# EAGLE board board to cad (EAGLE 8.0.0), part 1 of 14
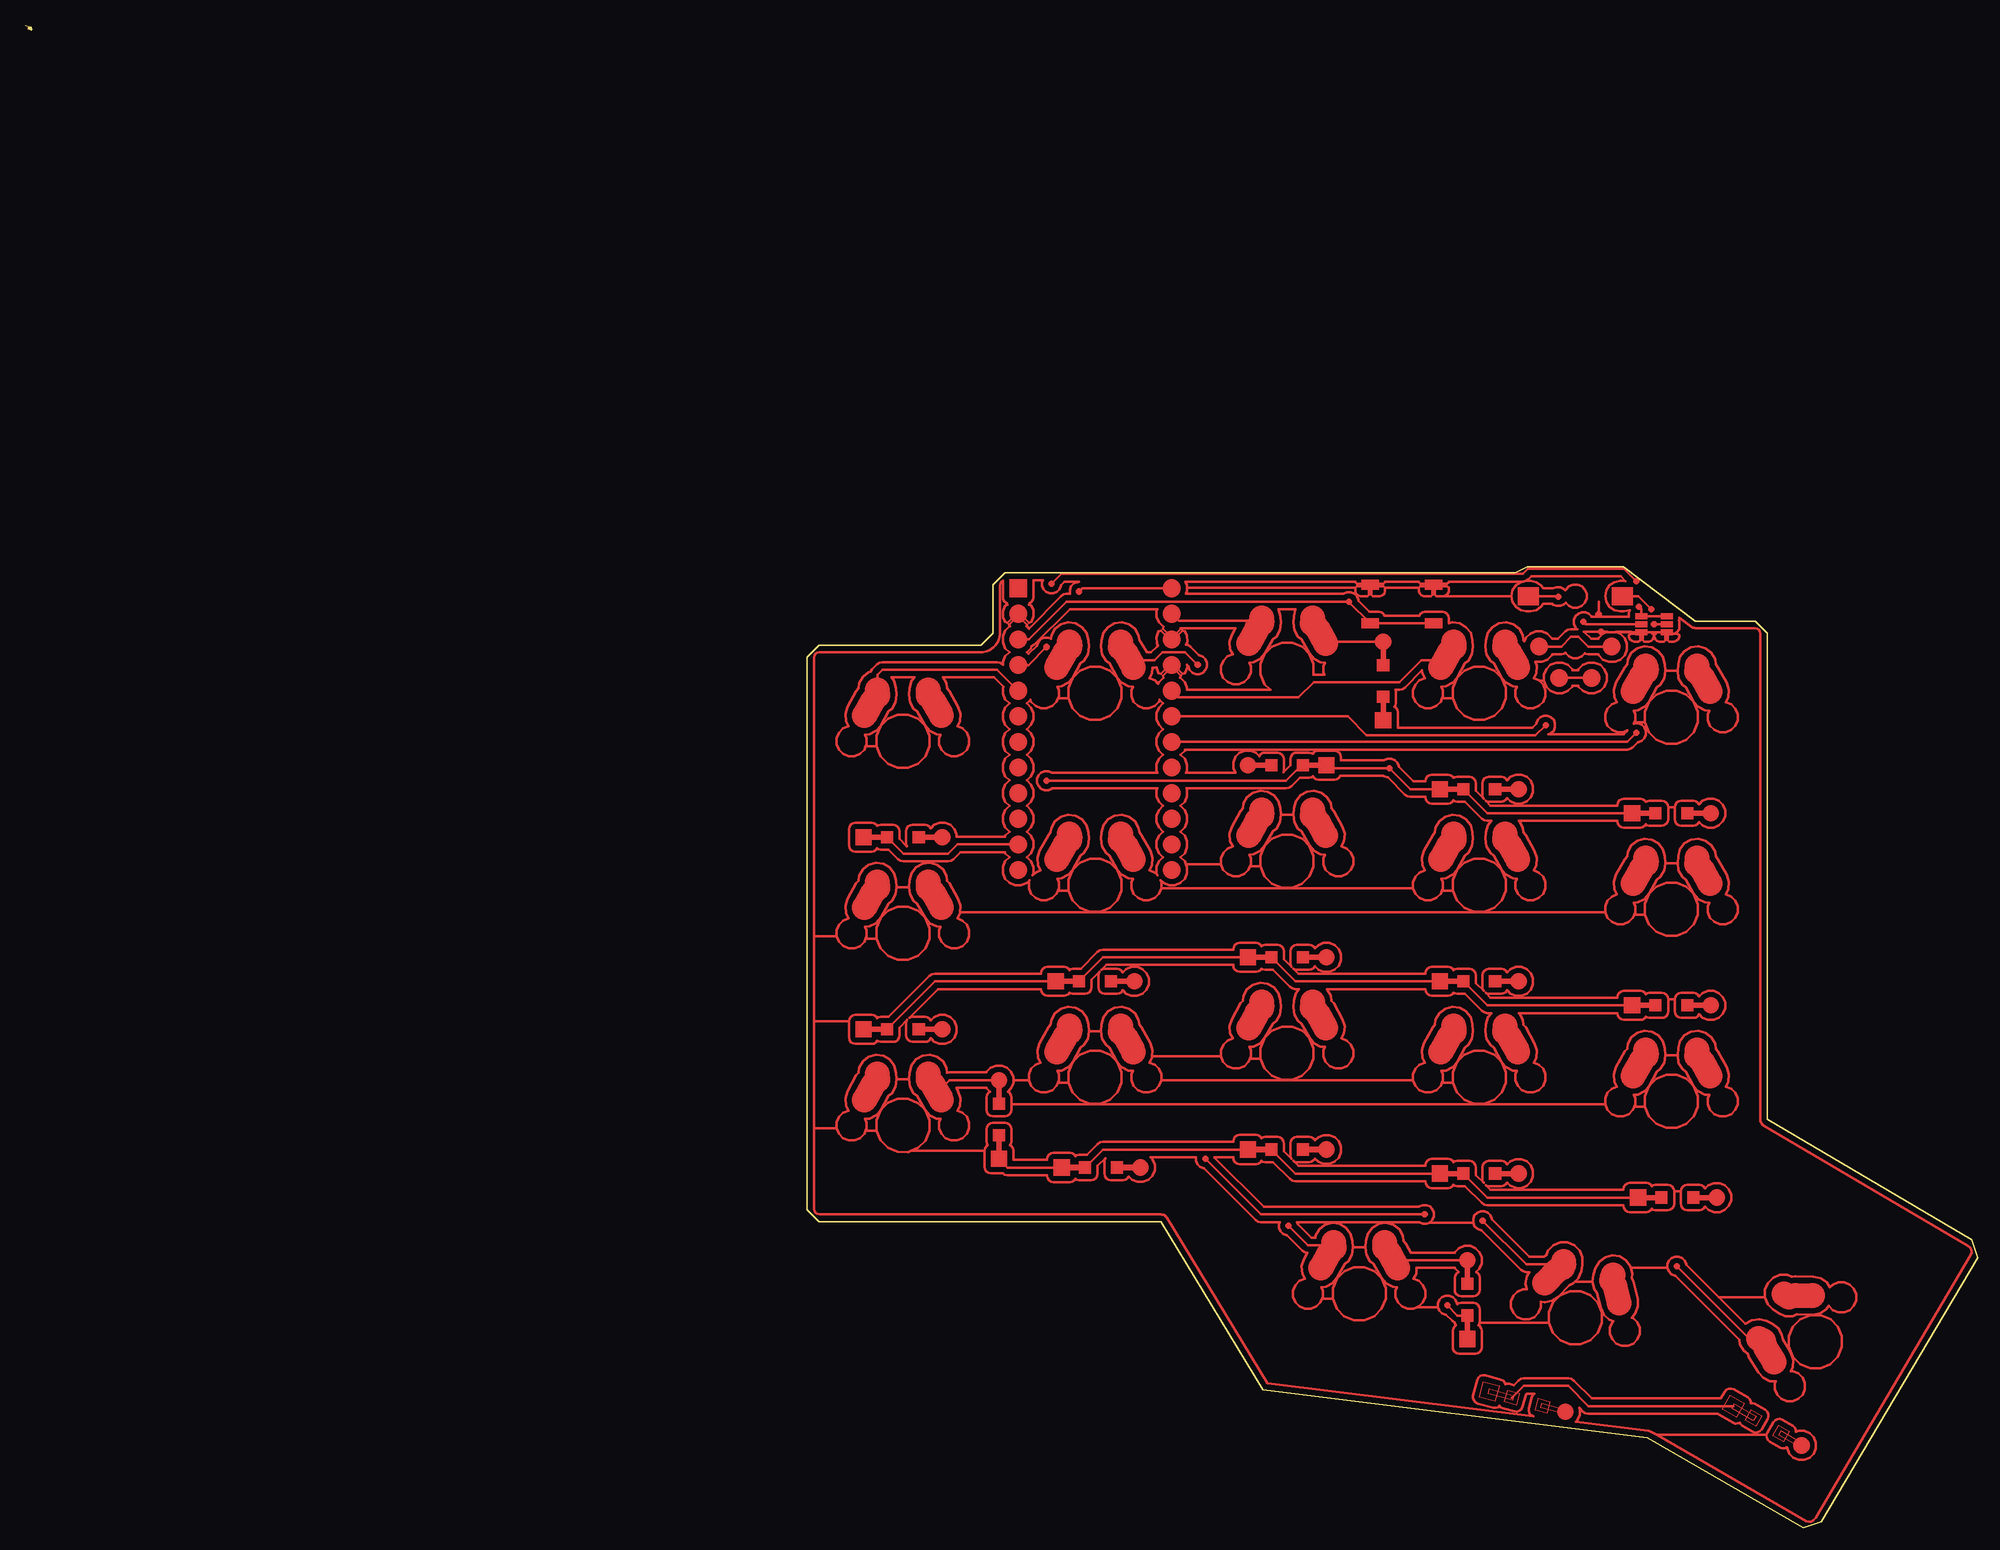
[diagram p0: board, top side]
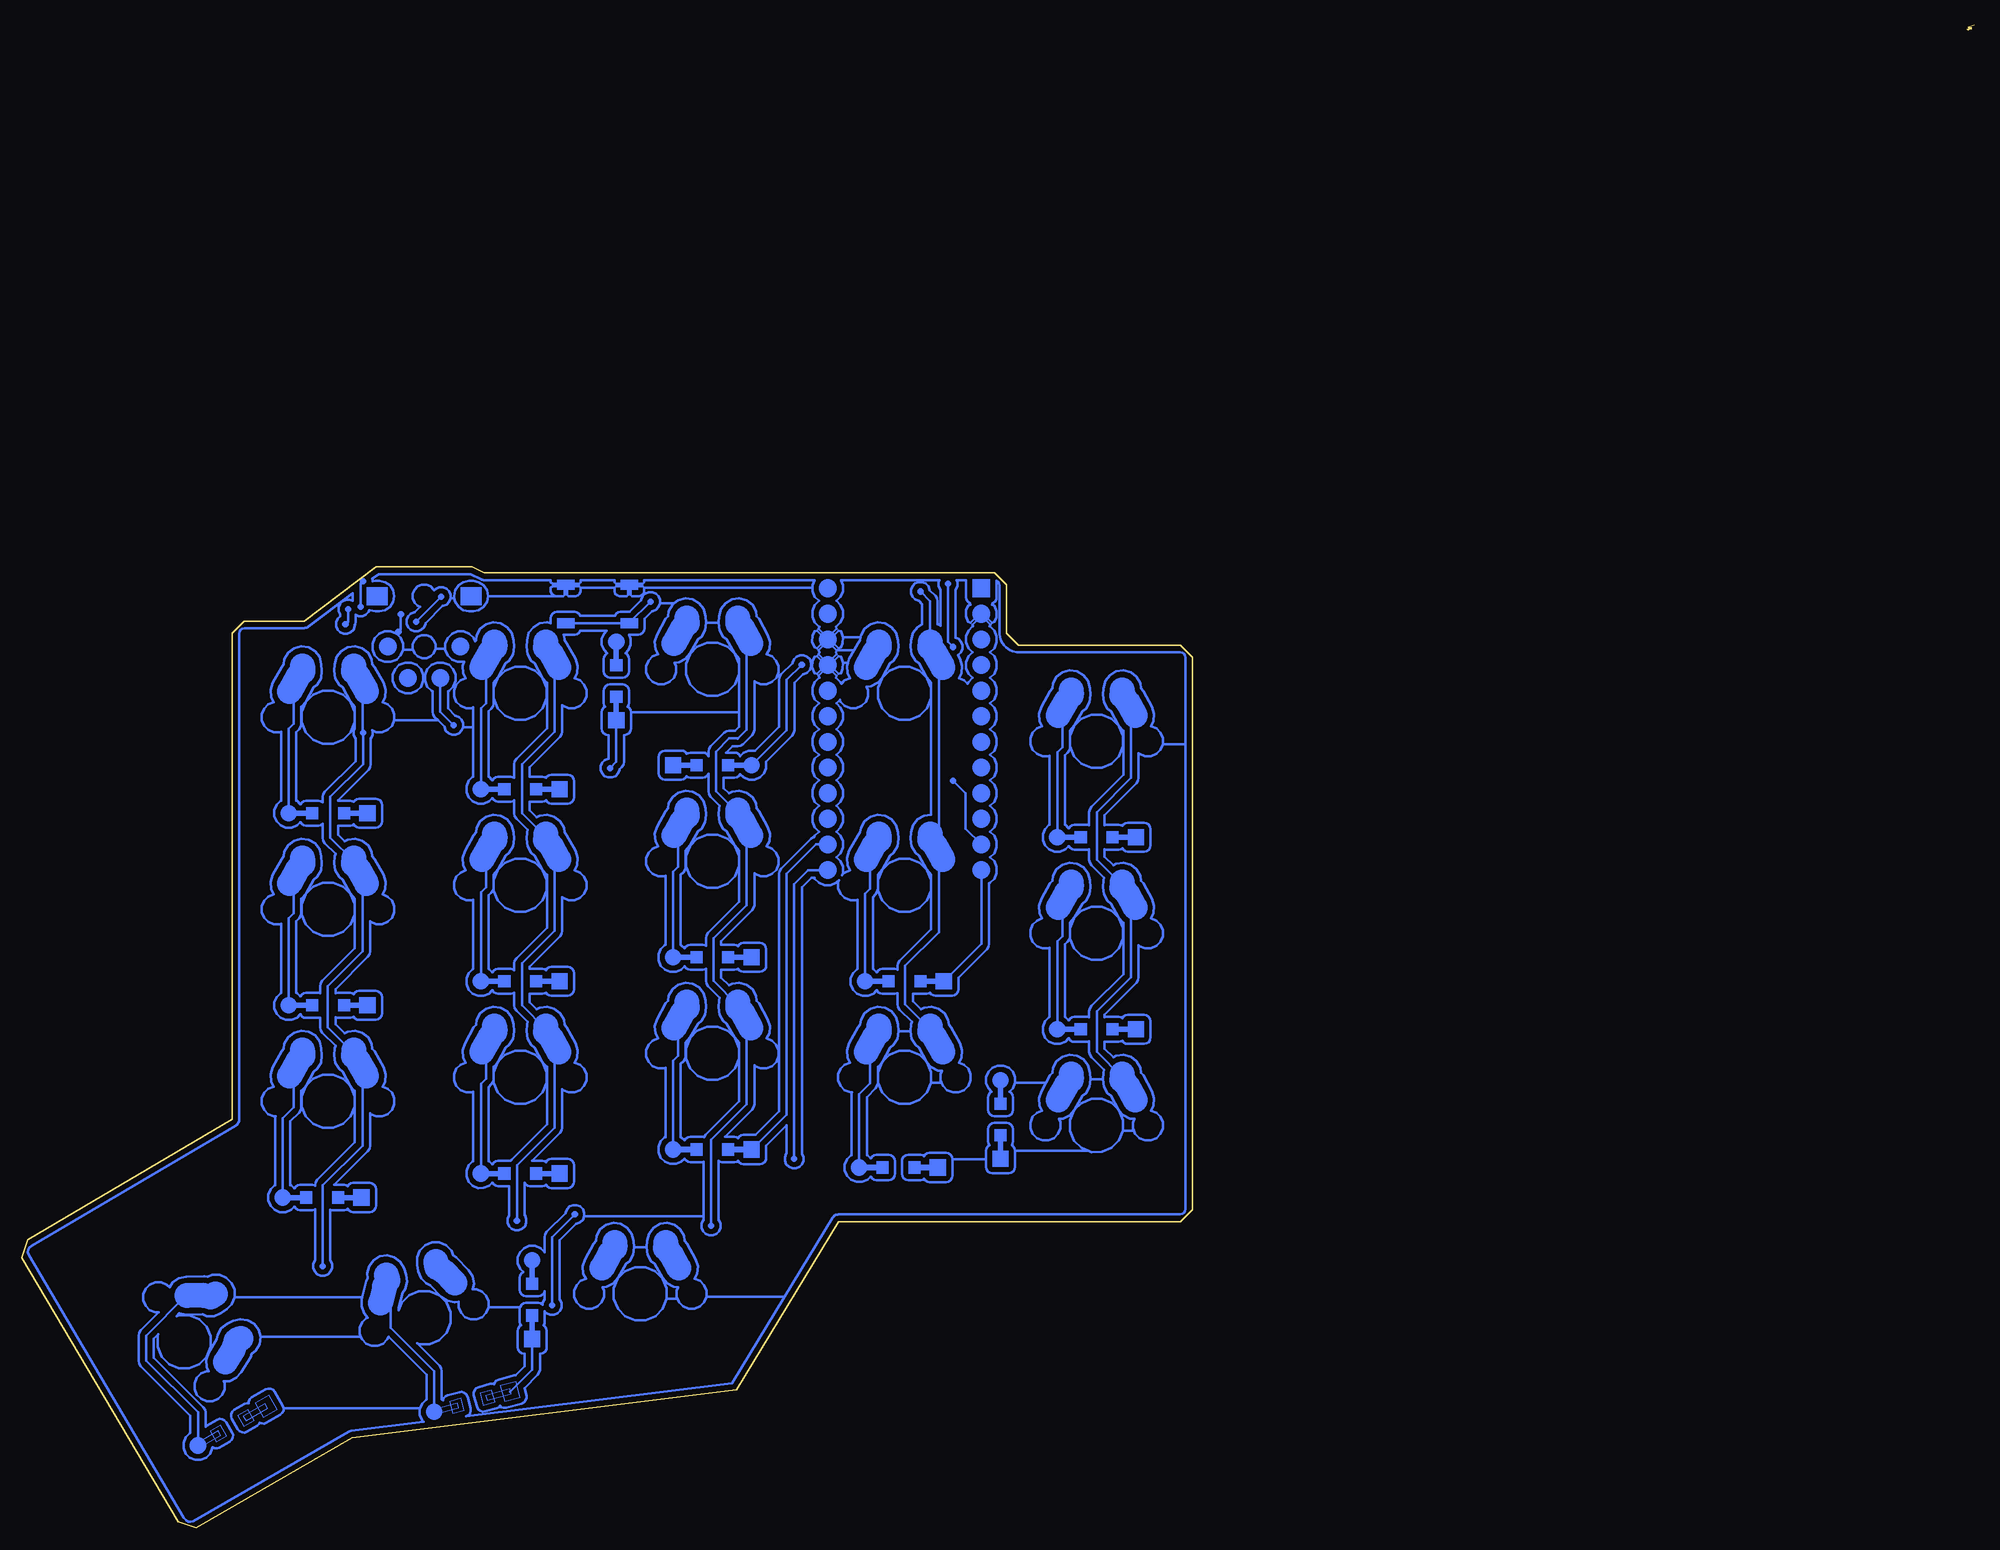
[diagram p1: board, bottom side, seen from below]

No outline drawn. Coordinates in mm, seen from the top.
Copper layers (1*16): Top 0.035mm / dielectric 1.5mm / Bottom 0.035mm
Design rules "default": minimum track width 10mil, minimum drill 24mil, track to track 8mil, track to pad 8mil, pad to pad 8mil, via to via 8mil, smd to smd 8mil, copper to edge 40mil, drill to drill 8mil, minimum pad ring 10mil, minimum via ring 8mil, stop-mask expansion 4mil, vias tented up to drill 0mil, thermal gap 10mil
Milling: 39 lines

## Placement (x,y rotation side)

## Tracks (layer width: path | path; a pad name or v marks a point on that pad's centre or on a via)
S$1
  Top 0: 0,0 0.6,-0.2
  Top 2.5: 171.84,-130.15 172.36,-130.41
  Bottom 2.5: 171.84,-130.15 172.36,-130.41
S$2
  Top 2.5: 175.54,-125.9 177.21,-125.92
  Bottom 2.5: 175.54,-125.9 177.21,-125.92
S$3
  Top 0: 0.6,-0.2 0.3,-0.2
  Top 2.5: 172.54,-131.09 173.4,-132.52
  Bottom 2.5: 172.54,-131.09 173.4,-132.52
S$4
  Top 0: 0.3,-0.2 0.3,-0.3
  Top 2.5: 174.38,-125.75 174.86,-126.08
  Bottom 2.5: 174.38,-125.75 174.86,-126.08
S$5
  Top 0: 0.3,-0.3 0.3,-0.4
  Top 0.1: 149.72,-137.28 150.03,-136.12
  Bottom 0.1: 145.05,-135.67 145.18,-135.18
S$6
  Top 0: 0.3,-0.4 0.3,-0.2
  Top 0.1: 150.03,-136.12 151.19,-136.43
  Bottom 0.1: 145.18,-135.18 147.59,-135.83
S$7
  Top 0: 0.3,-0.2 0.3,-0.3
  Top 0.1: 151.19,-136.43 150.88,-137.59
  Bottom 0.1: 147.59,-135.83 147.47,-136.31
S$8
  Top 0: 0.3,-0.3 0.3,-0.4
  Top 0.1: 150.88,-137.59 149.72,-137.28
  Bottom 0.1: 147.47,-136.31 145.05,-135.67
S$9
  Top 0: 0.3,-0.4 0.3,-0.2
S$10
  Top 0: 0.3,-0.2 0.3,-0.3
  Top 0.1: 146.68,-136.46 146.99,-135.3
  Bottom 0.1: 146.68,-136.46 146.99,-135.3
S$11
  Top 0: 0.3,-0.3 0.3,-0.4
  Top 0.1: 146.99,-135.3 148.15,-135.62
  Bottom 0.1: 146.99,-135.3 148.15,-135.62
S$12
  Top 0: 0.3,-0.4 0.4,-0.2
  Top 0.1: 148.15,-135.62 147.83,-136.77
  Bottom 0.1: 148.15,-135.62 147.83,-136.77
S$13
  Top 0: 0.4,-0.2 0.4,-0.3
  Top 0.1: 147.83,-136.77 146.68,-136.46
  Bottom 0.1: 147.83,-136.77 146.68,-136.46
S$14
  Top 0: 0.4,-0.3 0.4,-0.4
S$15
  Top 0: 0.4,-0.4 0.4,-0.2
  Top 0.1: 144.18,-136 144.6,-134.46
  Bottom 0.1: 149.72,-137.28 150.03,-136.12
S$16
  Top 0: 0.4,-0.2 0.4,-0.3
  Top 0.1: 144.6,-134.46 146.14,-134.87
  Bottom 0.1: 150.03,-136.12 151.19,-136.43
S$17
  Top 0: 0.4,-0.3 0.4,-0.4
  Top 0.1: 146.14,-134.87 145.73,-136.42
  Bottom 0.1: 151.19,-136.43 150.88,-137.59
S$18
  Top 0: 0.4,-0.4 0.5,-0.4
  Top 0.1: 145.73,-136.42 144.18,-136
  Bottom 0.1: 150.88,-137.59 149.72,-137.28
S$19
  Top 0: 0.5,-0.4 0.5,-0.2
S$20
  Top 0: 0.5,-0.2 0.5,-0.3
  Top 0.1: 145.05,-135.67 145.18,-135.18
  Bottom 0.1: 150.27,-137.06 150.4,-136.58
S$21
  Top 0: 0.5,-0.3 0.5,-0.4
  Top 0.1: 145.18,-135.18 147.59,-135.83
  Bottom 0.1: 150.4,-136.58 152.81,-137.23
S$22
  Top 0.1: 147.59,-135.83 147.47,-136.31
  Bottom 0.1: 152.81,-137.23 152.68,-137.71
S$23
  Top 0: 0.5,-0.4 0.5,-0.2
  Top 0.1: 147.47,-136.31 145.05,-135.67
  Bottom 0.1: 152.68,-137.71 150.27,-137.06
S$24
  Top 0: 0.5,-0.2 0.5,-0.3
S$25
  Top 0: 0.5,-0.3 0.5,-0.4
  Top 0.1: 150.27,-137.06 150.4,-136.58
  Bottom 0.1: 144.18,-136 144.6,-134.46
S$26
  Top 0.1: 150.4,-136.58 152.81,-137.23
  Bottom 0.1: 144.6,-134.46 146.14,-134.87
S$27
  Top 0: 0.5,-0.4 0.5,-0.2
  Top 0.1: 152.81,-137.23 152.68,-137.71
  Bottom 0.1: 146.14,-134.87 145.73,-136.42
S$28
  Top 0: 0.5,-0.2 0.5,-0.3
  Top 0.1: 152.68,-137.71 150.27,-137.06
  Bottom 0.1: 145.73,-136.42 144.18,-136
S$29
  Top 0: 0.5,-0.3 0.5,-0.4
S$30
  Top 0: 0.5,-0.4 0.6,-0.2
  Top 0.1: 173.29,-139.84 173.89,-138.8
  Bottom 0.1: 169.2,-137.07 169.45,-136.64
S$31
  Top 0: 0.6,-0.2 0.6,-0.3
  Top 0.1: 173.89,-138.8 174.93,-139.4
  Bottom 0.1: 169.45,-136.64 171.61,-137.89
S$32
  Top 0: 0.6,-0.3 0.6,-0.4
  Top 0.1: 174.93,-139.4 174.33,-140.44
  Bottom 0.1: 171.61,-137.89 171.36,-138.32
S$33
  Top 0: 0.6,-0.4 0.6,-0.5
  Top 0.1: 174.33,-140.44 173.29,-139.84
  Bottom 0.1: 171.36,-138.32 169.2,-137.07
S$34
  Top 0: 0.6,-0.5 0.6,-0.2
S$35
  Top 0: 0.6,-0.2 0.6,-0.3
  Top 0.1: 170.56,-138.26 171.16,-137.22
  Bottom 0.1: 170.56,-138.26 171.16,-137.22
S$36
  Top 0: 0.6,-0.3 0.6,-0.4
  Top 0.1: 171.16,-137.22 172.2,-137.82
  Bottom 0.1: 171.16,-137.22 172.2,-137.82
S$37
  Top 0: 0.6,-0.4 0.6,-0.5
  Top 0.1: 172.2,-137.82 171.6,-138.86
  Bottom 0.1: 172.2,-137.82 171.6,-138.86
S$38
  Top 0: 0.6,-0.5 0.7,-0.4
  Top 0.1: 171.6,-138.86 170.56,-138.26
  Bottom 0.1: 171.6,-138.86 170.56,-138.26
S$39
  Top 0: 0.7,-0.4 0.3,-0.2
S$40
  Top 0: 0.3,-0.2 0.3,-0.3
  Top 0.1: 168.27,-137.17 169.07,-135.78
  Bottom 0.1: 173.29,-139.84 173.89,-138.8
S$41
  Top 0: 0.3,-0.3 0.3,-0.4
  Top 0.1: 169.07,-135.78 170.46,-136.59
  Bottom 0.1: 173.89,-138.8 174.93,-139.4
S$42
  Top 0: 0.3,-0.4 0.4,-0.2
  Top 0.1: 170.46,-136.59 169.66,-137.97
  Bottom 0.1: 174.93,-139.4 174.33,-140.44
S$43
  Top 0: 0.4,-0.2 0.4,-0.3
  Top 0.1: 169.66,-137.97 168.27,-137.17
  Bottom 0.1: 174.33,-140.44 173.29,-139.84
S$44
  Top 0: 0.4,-0.3 0.4,-0.4
S$45
  Top 0: 0.4,-0.4 0.4,-0.2
  Top 0.1: 169.2,-137.07 169.45,-136.64
  Bottom 0.1: 173.87,-139.77 174.12,-139.34
S$46
  Top 0: 0.4,-0.2 0.4,-0.3
  Top 0.1: 169.45,-136.64 171.61,-137.89
  Bottom 0.1: 174.12,-139.34 176.29,-140.59
S$47
  Top 0: 0.4,-0.3 0.4,-0.4
  Top 0.1: 171.61,-137.89 171.36,-138.32
  Bottom 0.1: 176.29,-140.59 176.04,-141.02
S$48
  Top 0: 0.4,-0.4 0.5,-0.4
  Top 0.1: 171.36,-138.32 169.2,-137.07
  Bottom 0.1: 176.04,-141.02 173.87,-139.77
S$49
  Top 0: 0.5,-0.4 0.5,-0.2
S$50
  Top 0: 0.5,-0.2 0.5,-0.3
  Top 0.1: 173.87,-139.77 174.12,-139.34
  Bottom 0.1: 168.27,-137.17 169.07,-135.78
S$51
  Top 0: 0.5,-0.3 0.5,-0.4
  Top 0.1: 174.12,-139.34 176.29,-140.59
  Bottom 0.1: 169.07,-135.78 170.46,-136.59
S$52
  Top 0: 0.5,-0.4 0.6,-0.5
  Top 0.1: 176.29,-140.59 176.04,-141.02
  Bottom 0.1: 170.46,-136.59 169.66,-137.97
S$53
  Top 0: 0.6,-0.5 0.6,-0.2
  Top 0.1: 176.04,-141.02 173.87,-139.77
  Bottom 0.1: 169.66,-137.97 168.27,-137.17
S$54
  Top 0: 0.6,-0.2 0.6,-0.3
S$55
  Top 0: 0.6,-0.3 0.6,-0.4
  Top 2.5: 84.48,-65.88 84.52,-66.46
  Bottom 2.5: 84.48,-65.88 84.52,-66.46
S$56
  Top 0: 0.6,-0.4 0.6,-0.5
  Top 2.5: 90.02,-66.96 90.83,-68.42
  Bottom 2.5: 90.02,-66.96 90.83,-68.42
S$57
  Top 2.5: 84.02,-66.96 83.21,-68.42
  Bottom 2.5: 84.02,-66.96 83.21,-68.42
S$58
  Top 2.5: 89.56,-65.88 89.52,-66.46
  Bottom 2.5: 89.56,-65.88 89.52,-66.46
S$59
  Top 2.5: 103.53,-61.12 103.57,-61.7
  Bottom 2.5: 103.53,-61.12 103.57,-61.7
S$60
  Top 2.5: 109.07,-62.2 109.88,-63.66
  Bottom 2.5: 109.07,-62.2 109.88,-63.66
S$61
  Top 2.5: 103.07,-62.2 102.26,-63.66
  Bottom 2.5: 103.07,-62.2 102.26,-63.66
S$62
  Top 2.5: 108.61,-61.12 108.57,-61.7
  Bottom 2.5: 108.61,-61.12 108.57,-61.7
S$63
  Top 2.5: 122.58,-58.74 122.62,-59.32
  Bottom 2.5: 122.58,-58.74 122.62,-59.32
S$64
  Top 2.5: 128.12,-59.82 128.93,-61.28
  Bottom 2.5: 128.12,-59.82 128.93,-61.28
S$65
  Top 2.5: 122.12,-59.82 121.31,-61.28
  Bottom 2.5: 122.12,-59.82 121.31,-61.28
S$66
  Top 2.5: 127.66,-58.74 127.62,-59.32
  Bottom 2.5: 127.66,-58.74 127.62,-59.32
S$67
  Top 2.5: 141.63,-61.12 141.67,-61.7
  Bottom 2.5: 141.63,-61.12 141.67,-61.7
S$68
  Top 2.5: 147.17,-62.2 147.98,-63.66
  Bottom 2.5: 147.17,-62.2 147.98,-63.66
S$69
  Top 2.5: 141.17,-62.2 140.36,-63.66
  Bottom 2.5: 141.17,-62.2 140.36,-63.66
S$70
  Top 2.5: 146.71,-61.12 146.67,-61.7
  Bottom 2.5: 146.71,-61.12 146.67,-61.7
S$71
  Top 2.5: 160.68,-63.5 160.72,-64.08
  Bottom 2.5: 160.68,-63.5 160.72,-64.08
S$72
  Top 2.5: 166.22,-64.58 167.03,-66.04
  Bottom 2.5: 166.22,-64.58 167.03,-66.04
S$73
  Top 2.5: 160.22,-64.58 159.41,-66.04
  Bottom 2.5: 160.22,-64.58 159.41,-66.04
S$74
  Top 2.5: 165.76,-63.5 165.72,-64.08
  Bottom 2.5: 165.76,-63.5 165.72,-64.08
S$75
  Top 2.5: 84.48,-84.93 84.52,-85.51
  Bottom 2.5: 84.48,-84.93 84.52,-85.51
S$76
  Top 2.5: 90.02,-86.01 90.83,-87.47
  Bottom 2.5: 90.02,-86.01 90.83,-87.47
S$77
  Top 2.5: 84.02,-86.01 83.21,-87.47
  Bottom 2.5: 84.02,-86.01 83.21,-87.47
S$78
  Top 2.5: 89.56,-84.93 89.52,-85.51
  Bottom 2.5: 89.56,-84.93 89.52,-85.51
S$79
  Top 2.5: 103.53,-80.17 103.57,-80.75
  Bottom 2.5: 103.53,-80.17 103.57,-80.75
S$80
  Top 2.5: 109.07,-81.25 109.88,-82.71
  Bottom 2.5: 109.07,-81.25 109.88,-82.71
S$81
  Top 2.5: 103.07,-81.25 102.26,-82.71
  Bottom 2.5: 103.07,-81.25 102.26,-82.71
S$82
  Top 2.5: 108.61,-80.17 108.57,-80.75
  Bottom 2.5: 108.61,-80.17 108.57,-80.75
S$83
  Top 2.5: 122.58,-77.79 122.62,-78.37
  Bottom 2.5: 122.58,-77.79 122.62,-78.37
S$84
  Top 2.5: 128.12,-78.87 128.93,-80.33
  Bottom 2.5: 128.12,-78.87 128.93,-80.33
S$85
  Top 2.5: 122.12,-78.87 121.31,-80.33
  Bottom 2.5: 122.12,-78.87 121.31,-80.33
S$86
  Top 2.5: 127.66,-77.79 127.62,-78.37
  Bottom 2.5: 127.66,-77.79 127.62,-78.37
S$87
  Top 2.5: 141.63,-80.17 141.67,-80.75
  Bottom 2.5: 141.63,-80.17 141.67,-80.75
S$88
  Top 2.5: 147.17,-81.25 147.98,-82.71
  Bottom 2.5: 147.17,-81.25 147.98,-82.71
S$89
  Top 2.5: 141.17,-81.25 140.36,-82.71
  Bottom 2.5: 141.17,-81.25 140.36,-82.71
S$90
  Top 2.5: 146.71,-80.17 146.67,-80.75
  Bottom 2.5: 146.71,-80.17 146.67,-80.75
S$91
  Top 2.5: 160.68,-82.55 160.72,-83.13
  Bottom 2.5: 160.68,-82.55 160.72,-83.13
S$92
  Top 2.5: 166.22,-83.63 167.03,-85.09
  Bottom 2.5: 166.22,-83.63 167.03,-85.09
S$93
  Top 2.5: 160.22,-83.63 159.41,-85.09
  Bottom 2.5: 160.22,-83.63 159.41,-85.09
S$94
  Top 2.5: 165.76,-82.55 165.72,-83.13
  Bottom 2.5: 165.76,-82.55 165.72,-83.13
S$95
  Top 2.5: 84.48,-103.98 84.52,-104.56
  Bottom 2.5: 84.48,-103.98 84.52,-104.56
S$96
  Top 2.5: 90.02,-105.06 90.83,-106.52
  Bottom 2.5: 90.02,-105.06 90.83,-106.52
S$97
  Top 2.5: 84.02,-105.06 83.21,-106.52
  Bottom 2.5: 84.02,-105.06 83.21,-106.52
S$98
  Top 2.5: 89.56,-103.98 89.52,-104.56
  Bottom 2.5: 89.56,-103.98 89.52,-104.56
S$99
  Top 2.5: 103.53,-99.22 103.57,-99.8
  Bottom 2.5: 103.53,-99.22 103.57,-99.8
S$100
  Top 2.5: 109.07,-100.3 109.88,-101.76
  Bottom 2.5: 109.07,-100.3 109.88,-101.76
S$101
  Top 2.5: 103.07,-100.3 102.26,-101.76
  Bottom 2.5: 103.07,-100.3 102.26,-101.76
S$102
  Top 2.5: 108.61,-99.22 108.57,-99.8
  Bottom 2.5: 108.61,-99.22 108.57,-99.8
S$103
  Top 2.5: 122.58,-96.84 122.62,-97.42
  Bottom 2.5: 122.58,-96.84 122.62,-97.42
S$104
  Top 2.5: 128.12,-97.92 128.93,-99.38
  Bottom 2.5: 128.12,-97.92 128.93,-99.38
S$105
  Top 2.5: 122.12,-97.92 121.31,-99.38
  Bottom 2.5: 122.12,-97.92 121.31,-99.38
S$106
  Top 2.5: 127.66,-96.84 127.62,-97.42
  Bottom 2.5: 127.66,-96.84 127.62,-97.42
S$107
  Top 2.5: 141.63,-99.22 141.67,-99.8
  Bottom 2.5: 141.63,-99.22 141.67,-99.8
S$108
  Top 2.5: 147.17,-100.3 147.98,-101.76
  Bottom 2.5: 147.17,-100.3 147.98,-101.76
S$109
  Top 2.5: 141.17,-100.3 140.36,-101.76
  Bottom 2.5: 141.17,-100.3 140.36,-101.76
S$110
  Top 2.5: 146.71,-99.22 146.67,-99.8
  Bottom 2.5: 146.71,-99.22 146.67,-99.8
S$111
  Top 2.5: 160.68,-101.6 160.72,-102.18
  Bottom 2.5: 160.68,-101.6 160.72,-102.18
S$112
  Top 2.5: 166.22,-102.68 167.03,-104.14
  Bottom 2.5: 166.22,-102.68 167.03,-104.14
S$113
  Top 2.5: 160.22,-102.68 159.41,-104.14
  Bottom 2.5: 160.22,-102.68 159.41,-104.14
S$114
  Top 2.5: 165.76,-101.6 165.72,-102.18
  Bottom 2.5: 165.76,-101.6 165.72,-102.18
S$115
  Top 2.5: 129.72,-120.65 129.76,-121.23
  Bottom 2.5: 129.72,-120.65 129.76,-121.23
S$116
  Top 2.5: 135.26,-121.73 136.07,-123.19
  Bottom 2.5: 135.26,-121.73 136.07,-123.19
S$117
  Top 2.5: 129.26,-121.73 128.45,-123.19
  Bottom 2.5: 129.26,-121.73 128.45,-123.19
S$118
  Top 2.5: 134.8,-120.65 134.76,-121.23
  Bottom 2.5: 134.8,-120.65 134.76,-121.23
S$119
  Top 2.5: 152.56,-122.55 152.44,-123.12
  Bottom 2.5: 152.56,-122.55 152.44,-123.12
S$120
  Top 2.5: 157.63,-125.03 158.03,-126.64
  Bottom 2.5: 157.63,-125.03 158.03,-126.64
S$121
  Top 2.5: 151.83,-123.47 150.67,-124.67
  Bottom 2.5: 151.83,-123.47 150.67,-124.67
S$122
  Top 2.5: 157.46,-123.86 157.27,-124.41
  Bottom 2.5: 157.46,-123.86 157.27,-124.41
S$123
  Top 0.25: 126.69,-73.34 126.54,-73.34
  Bottom 0.25: 90.92,-80.49 90.92,-72.05
S$124
  Top 0.25: 126.54,-73.34 125,-74.88
  Bottom 0.25: 90.42,-71.56 90.42,-67.69
S$125
  Top 0.25: 125,-74.88 101.25,-74.88
  Bottom 0.25: 90.92,-72.05 90.42,-71.56
S$126
  Top 0.25: 98.45,-81.2 92.43,-81.2
  Bottom 0.25: 101.25,-74.88 100,-76.13
S$127
  Top 0.25: 87.09,-82.13 85.44,-80.49
  Bottom 0.25: 100,-76.13 100,-79.65
S$128
  Top 0.25: 91.5,-82.13 87.09,-82.13
  Bottom 0.25: 100,-79.65 98.45,-81.2
S$129
  Top 0.25: 92.43,-81.2 91.5,-82.13
  Bottom 0.25: 134.64,-68.91 134.64,-73.03
S$130
  Top 0.25: 135.25,-73.63 129.31,-73.63
  Bottom 0.25: 134.64,-73.03 135.25,-73.63
S$131
  Top 0.25: 129.31,-73.63 129.02,-73.34
  Bottom 0.25: 117.75,-69.88 121.22,-73.34
S$132
  Top 0.25: 137.34,-75.72 140.27,-75.72
  Bottom 0.25: 117.75,-64.88 117.75,-69.88
S$133
  Top 0.25: 135.25,-73.63 137.34,-75.72
  Bottom 0.25: 116.25,-63.38 117.75,-64.88
S$134
  Top 0.25: 159.32,-78.11 144.97,-78.11
  Bottom 0.25: 148.07,-75.72 148.07,-67.7
S$135
  Top 0.25: 144.97,-78.11 142.59,-75.72
  Bottom 0.25: 147.57,-67.2 147.57,-62.93
S$136
  Top 0.25: 109.47,-62.93 111.95,-62.93
  Bottom 0.25: 148.07,-67.7 147.57,-67.2
S$137
  Top 0.25: 115,-62.13 116.25,-63.38
  Bottom 0.25: 167.12,-78.11 167.12,-69.75
S$138
  Top 0.25: 112.75,-62.13 115,-62.13
  Bottom 0.25: 166.62,-69.25 166.62,-65.31
S$139
  Top 0.25: 111.95,-62.93 112.75,-62.13
  Bottom 0.25: 167.12,-69.75 166.62,-69.25
S$140
  Top 0.25: 134.64,-61.11 129.08,-61.11
  Bottom 0.25: 90.92,-99.54 90.92,-90.8
S$141
  Top 0.25: 129.08,-61.11 128.52,-60.55
  Bottom 0.25: 90.42,-90.31 90.42,-86.74
S$142
  Top 0.25: 102.17,-94.78 90.21,-94.78
  Bottom 0.25: 90.92,-90.8 90.42,-90.31
S$143
  Top 0.25: 90.21,-94.78 85.44,-99.54
  Bottom 0.25: 98.45,-83.74 98.45,-91.06
S$144
  Top 0.25: 121.22,-92.39 106.88,-92.39
  Bottom 0.25: 98.45,-91.06 102.17,-94.78
S$145
  Top 0.25: 106.88,-92.39 104.49,-94.78
  Bottom 0.25: 109.97,-94.78 109.97,-86.1
S$146
  Top 0.25: 140.27,-94.78 125.92,-94.78
  Bottom 0.25: 109.47,-85.61 109.47,-81.98
S$147
  Top 0.25: 125.92,-94.78 123.54,-92.39
  Bottom 0.25: 109.97,-86.1 109.47,-85.61
S$148
  Top 0.25: 159.32,-97.16 144.97,-97.16
  Bottom 0.25: 129.02,-92.39 129.02,-83.9
S$149
  Top 0.25: 144.97,-97.16 142.59,-94.78
  Bottom 0.25: 128.52,-83.41 128.52,-79.6
S$150
  Top 0.25: 96.54,-104.57 91.65,-104.57
  Bottom 0.25: 129.02,-83.9 128.52,-83.41
S$151
  Top 0.25: 91.65,-104.57 90.42,-105.79
  Bottom 0.25: 148.07,-94.78 148.07,-85.95
S$152
  Top 0.25: 102.76,-113.23 97.41,-113.23
  Bottom 0.25: 147.57,-85.45 147.57,-81.98
S$153
  Top 0.25: 97.41,-113.23 96.54,-112.37
  Bottom 0.25: 148.07,-85.95 147.57,-85.45
S$154
  Top 0.25: 121.22,-111.44 106.88,-111.44
  Bottom 0.25: 167.12,-97.16 167.12,-88.5
S$155
  Top 0.25: 106.88,-111.44 105.09,-113.23
  Bottom 0.25: 166.62,-88 166.62,-84.36
S$156
  Top 0.25: 140.27,-113.83 125.92,-113.83
  Bottom 0.25: 167.12,-88.5 166.62,-88
S$157
  Top 0.25: 125.92,-113.83 123.54,-111.44
  Bottom 0.25: 113.69,-81.2 114.82,-81.2
S$158
  Top 0.25: 159.91,-116.21 144.97,-116.21
  Bottom 0.25: 117.75,-107.97 121.22,-111.44
S$159
  Top 0.25: 144.97,-116.21 142.59,-113.83
  Bottom 0.25: 117.75,-84.13 117.75,-107.97
S$160
  Top 0.25: 142.98,-122.43 135.7,-122.43
  Bottom 0.25: 114.82,-81.2 117.75,-84.13
S$161
  Top 0.25: 135.7,-122.43 135.67,-122.46
  Bottom 0.25: 110.56,-113.23 110.56,-105.94
S$162
  Top 0.25: 142.02,-127.9 142.98,-127.9
  Bottom 0.25: 109.47,-104.86 109.47,-101.03
S$163
  Top 0.25: 141,-126.88 142.02,-127.9
  Bottom 0.25: 110.56,-105.94 109.47,-104.86
S$164
  Top 0.25: 122.5,-117.88 138.75,-117.88
  Bottom 0.25: 129.02,-111.44 129.02,-102.65
S$165
  Top 0.25: 117,-112.38 122.5,-117.88
  Bottom 0.25: 128.52,-102.16 128.52,-98.65
S$166
  Top 0.25: 169.37,-136.88 155,-136.88
  Bottom 0.25: 129.02,-102.65 128.52,-102.16
S$167
  Top 0.25: 148.57,-134.88 147.41,-136.04
  Bottom 0.25: 148.07,-113.83 148.07,-104.95
S$168
  Top 0.25: 153,-134.88 148.57,-134.88
  Bottom 0.25: 147.57,-104.45 147.57,-101.03
S$169
  Top 0.25: 155,-136.88 153,-134.88
  Bottom 0.25: 148.07,-104.95 147.57,-104.45
S$170
  Top 0.25: 84.5,-66.17 84.5,-64.38
  Bottom 0.25: 167.71,-116.21 167.71,-108.34
S$171
  Top 0.25: 96.37,-63.88 98.45,-65.96
  Bottom 0.25: 166.62,-107.25 166.62,-103.41
S$172
  Top 0.25: 85,-63.88 96.37,-63.88
  Bottom 0.25: 167.71,-108.34 166.62,-107.25
S$173
  Top 0.25: 84.5,-64.38 85,-63.88
  Bottom 0.25: 113.69,-83.74 115.61,-83.74
S$174
  Top 0.25: 113.69,-55.8 104.83,-55.8
  Bottom 0.25: 141,-120.13 141,-126.88
S$175
  Top 0.25: 104.83,-55.8 104.5,-56.13
  Bottom 0.25: 138.75,-117.88 141,-120.13
S$176
  Top 0.25: 127.19,-120.94 129.74,-120.94
  Bottom 0.25: 117,-85.13 117,-112.38
S$177
  Top 0.25: 125.25,-119 127.19,-120.94
  Bottom 0.25: 115.61,-83.74 117,-85.13
S$178
  Top 0.25: 122.6,-59.03 114.38,-59.03
  Bottom 0.25: 142.98,-130.23 142.98,-133.25
S$179
  Top 0.25: 114.38,-59.03 113.69,-58.34
  Bottom 0.25: 142.98,-133.25 145.16,-135.44
S$180
  Top 0.25: 144.5,-118.5 148.83,-122.83
  Bottom 0.25: 152.7,-137.46 152.7,-133.43
S$181
  Top 0.25: 148.83,-122.83 152.5,-122.83
  Bottom 0.25: 157,-129.13 157,-126.66
S$182
  Top 0.25: 140.76,-62.93 138.45,-62.93
  Bottom 0.25: 152.7,-133.43 157,-129.13
S$183
  Top 0.25: 114.36,-66.63 113.69,-65.96
  Bottom 0.25: 157,-126.66 157.83,-125.83
S$184
  Top 0.25: 126.25,-66.63 114.36,-66.63
  Bottom 0.25: 176.12,-140.78 176.12,-137.51
S$185
  Top 0.25: 127.75,-65.13 126.25,-66.63
  Bottom 0.25: 181.25,-129.88 177.28,-125.91
S$186
  Top 0.25: 136.25,-65.13 127.75,-65.13
  Bottom 0.25: 181.25,-132.38 181.25,-129.88
S$187
  Top 0.25: 138.45,-62.93 136.25,-65.13
  Bottom 0.25: 176.12,-137.51 181.25,-132.38
S$188
  Top 0.25: 163.75,-123 171.03,-130.28
  Bottom 0.25: 177.28,-125.91 176.38,-125.91
S$189
  Top 0.25: 171.03,-130.28 172.1,-130.28
  Bottom 0.25: 83.61,-67.69 83.61,-74.61
S$190
  Top 0.25: 113.69,-71.04 158.84,-71.04
  Bottom 0.25: 87,-82.72 84.5,-85.22
S$191
  Top 0.25: 158.84,-71.04 159.75,-70.13
  Bottom 0.25: 87,-78 87,-82.72
S$192
  Top 0.25: 171.15,-130.28 172.1,-130.28
  Bottom 0.25: 83.61,-74.61 87,-78
S$193
  Top 0.25: 113.69,-68.5 131.12,-68.5
  Bottom 0.25: 83.61,-86.74 83.61,-94.36
S$194
  Top 0.25: 149.75,-70.38 150.75,-69.38
  Bottom 0.25: 87,-101.77 84.5,-104.27
S$195
  Top 0.25: 133,-70.38 149.75,-70.38
  Bottom 0.25: 87,-97.75 87,-101.77
S$196
  Top 0.25: 131.12,-68.5 133,-70.38
  Bottom 0.25: 83.61,-94.36 87,-97.75
S$197
  Top 0.25: 152.09,-64.7 155.29,-64.7
  Bottom 0.25: 102.66,-81.98 102.66,-89.91
S$198
  Top 0.25: 150.09,-61.6 152.28,-61.6
  Bottom 0.25: 106,-97.06 103.55,-99.51
S$199
  Top 0.25: 154.97,-61.6 157.3,-61.6
  Bottom 0.25: 106,-93.25 106,-97.06
S$200
  Top 0.25: 154,-60.63 154.97,-61.6
  Bottom 0.25: 102.66,-89.91 106,-93.25
S$201
  Top 0.25: 153.25,-60.63 154,-60.63
  Bottom 0.25: 103.55,-57.08 103.55,-61.41
S$202
  Top 0.25: 152.28,-61.6 153.25,-60.63
  Bottom 0.25: 104.5,-56.13 103.55,-57.08
S$203
  Top 0.25: 162.75,-59.38 161.5,-59.38
  Bottom 0.25: 102.66,-62.93 102.66,-81.98
S$204
  Top 0.25: 159.96,-56.59 158.34,-56.59
  Bottom 0.25: 121.71,-98.65 121.71,-106.96
S$205
  Top 0.25: 161.25,-57.88 159.96,-56.59
  Bottom 0.25: 125.25,-110.5 125.25,-119
S$206
  Top 0.25: 149.05,-56.59 151.96,-56.59
  Bottom 0.25: 121.71,-106.96 125.25,-110.5
S$207
  Top 0.25: 154.75,-59.38 160.25,-59.38
  Bottom 0.25: 121.71,-79.6 121.71,-87.21
S$208
  Top 0.25: 154.5,-59.13 154.75,-59.38
  Bottom 0.25: 125,-94.73 122.6,-97.13
S$209
  Top 0.25: 151.96,-56.59 152,-56.63
  Bottom 0.25: 125,-90.5 125,-94.73
S$210
  Top 0.25: 160.25,-60.18 156.3,-60.18
  Bottom 0.25: 121.71,-87.21 125,-90.5
S$211
  Top 0.25: 156,-58.38 156,-57.13
  Bottom 0.25: 122.56,-70.69 123.44,-70.69
S$212
  Top 0.25: 156.3,-60.18 156.25,-60.13
  Bottom 0.25: 124.75,-75.93 122.6,-78.08
S$213
  Top 0.25: 162.75,-60.18 160.25,-60.18
  Bottom 0.25: 124.75,-72 124.75,-75.93
S$214
  Top 0.25: 148.5,-54.38 133,-54.38
  Bottom 0.25: 123.44,-70.69 124.75,-72
S$215
  Top 0.25: 99.46,-63.42 101.25,-61.63
  Bottom 0.25: 121.71,-60.55 121.71,-69.84
S$216
  Top 0.25: 101.75,-55.38 102.75,-54.38
  Bottom 0.25: 121.71,-69.84 122.56,-70.69
S$217
  Top 0.25: 102.75,-54.38 133,-54.38
  Bottom 0.25: 122.56,-70.69 122.6,-70.73
S$218
  Top 0.25: 99.46,-63.42 98.45,-63.42
  Bottom 0.25: 140.76,-62.93 140.76,-70.01
S$219
  Top 0.25: 160.25,-58.58 160.25,-57.88
  Bottom 0.25: 144,-78.11 141.65,-80.46
S$220
  Top 0.25: 148.5,-54.38 149,-53.88
  Bottom 0.25: 144,-73.25 144,-78.11
S$221
  Top 0.25: 149,-53.88 158.5,-53.88
  Bottom 0.25: 140.76,-70.01 144,-73.25
S$222
  Top 0.25: 158.5,-53.88 159.75,-55.13
  Bottom 0.25: 140.76,-101.03 140.76,-109.26
S$223
  Top 0.25: 160.25,-57.88 160,-57.63
  Bottom 0.25: 144.5,-113 144.5,-118.5
S$224
  Top 0.25: 160.25,-58.58 162.75,-58.58
  Bottom 0.25: 140.76,-109.26 144.5,-113
S$225
  Top 0.25: 131.22,-57.16 131.2,-57.13
  Bottom 0.25: 140.76,-81.98 140.76,-89.76
S$226
  Top 0.25: 131.25,-57.13 131.22,-57.16
  Bottom 0.25: 144,-97.16 141.65,-99.51
S$227
  Top 0.25: 133.35,-59.28 139.65,-59.28
  Bottom 0.25: 144,-93 144,-97.16
S$228
  Top 0.25: 98.45,-60.88 99.5,-60.88
  Bottom 0.25: 140.76,-89.76 144,-93
S$229
  Top 0.25: 131.2,-57.13 133.35,-59.28
  Bottom 0.25: 159.75,-70.13 159.75,-73.25
S$230
  Top 0.25: 103.25,-57.13 131.2,-57.13
  Bottom 0.25: 163,-80.54 160.7,-82.84
S$231
  Top 0.25: 99.5,-60.88 103.25,-57.13
  Bottom 0.25: 163,-76.5 163,-80.54
S$232
  Top 0.254: 158.65,-55.11 158.53,-55.08
  Bottom 0.25: 159.75,-73.25 163,-76.5
S$233
  Top 0.254: 158.53,-55.08 158.16,-55.08
  Bottom 0.25: 159.81,-103.41 159.81,-111.06
S$234
  Top 0.254: 158.16,-55.08 157.58,-55.2
  Bottom 0.25: 163.75,-115 163.75,-123
S$235
  Top 0.254: 157.58,-55.2 157.09,-55.52
  Bottom 0.25: 159.81,-111.06 163.75,-115
S$236
  Top 0.254: 157.09,-55.52 156.76,-56.02
  Bottom 0.25: 159.81,-84.36 159.81,-91.81
S$237
  Top 0.254: 156.76,-56.02 156.65,-56.59
  Bottom 0.25: 163.25,-99.34 160.7,-101.89
S$238
  Top 0.254: 156.65,-56.59 156.76,-57.17
  Bottom 0.25: 163.25,-95.25 163.25,-99.34
S$239
  Top 0.254: 156.76,-57.17 157.09,-57.66
  Bottom 0.25: 159.81,-91.81 163.25,-95.25
S$240
  Top 0.254: 157.09,-57.66 157.58,-57.99
  Bottom 0.25: 159.75,-70.13 159.81,-70.13
S$241
  Top 0.254: 157.58,-57.99 158.16,-58.1
  Bottom 0.25: 159.81,-65.31 159.81,-70.13
S$242
  Top 0.254: 158.16,-58.1 158.53,-58.1
  Bottom 0.25: 152.09,-68.04 152.09,-64.7
S$243
  Top 0.254: 158.53,-58.1 159.08,-58
  Bottom 0.25: 150.75,-69.38 152.09,-68.04
S$244
  Top 0.254: 159.08,-58 159.05,-58.03
  Bottom 0.25: 161.25,-59.13 161.25,-57.88
S$245
  Top 0.254: 159.05,-58.03 159,-58.28
  Bottom 0.25: 161.5,-59.38 161.25,-59.13
S$246
  Top 0.254: 159,-58.28 159,-58.62
  Bottom 0.25: 152,-56.63 154.5,-59.13
S$247
  Top 0.254: 159,-58.62 155.3,-58.62
  Bottom 0.25: 156,-59.88 156,-58.38
S$248
  Top 0.254: 155.3,-58.62 155.29,-58.6
  Bottom 0.25: 156.25,-60.13 156,-59.88
S$249
  Top 0.254: 155.29,-58.6 155.03,-58.34
  Bottom 0.25: 101.25,-61.63 101.75,-61.13
S$250
  Top 0.254: 155.03,-58.34 154.69,-58.2
  Bottom 0.25: 101.75,-61.13 101.75,-55.38
S$251
  Top 0.254: 154.69,-58.2 154.31,-58.2
  Bottom 0.25: 160,-55.38 159.75,-55.13
S$252
  Top 0.254: 154.31,-58.2 153.97,-58.34
  Bottom 0.25: 160,-57.63 160,-55.38
S$253
  Top 0.254: 153.97,-58.34 153.71,-58.6
  Bottom 0.25: 133.35,-59.28 133.35,-59.23
S$254
  Top 0.254: 153.71,-58.6 153.56,-58.94
  Bottom 0.25: 133.35,-59.23 131.25,-57.13
S$255
  Top 0.254: 153.56,-58.94 153.56,-59.32
  Bottom 0.25: 139.65,-59.28 133.35,-59.28
S$256
  Top 0.254: 153.56,-59.32 153.71,-59.66
  Bottom 0.254: 158.84,-54.88 158.81,-54.94
S$257
  Top 0.254: 153.71,-59.66 153.92,-59.87
  Bottom 0.254: 158.81,-54.94 158.81,-55.14
S$258
  Top 0.254: 153.92,-59.87 153.25,-59.87
  Bottom 0.254: 158.81,-55.14 158.53,-55.08
S$259
  Top 0.254: 153.25,-59.87 152.96,-59.93
  Bottom 0.254: 158.53,-55.08 158.16,-55.08
S$260
  Top 0.254: 152.96,-59.93 152.71,-60.09
  Bottom 0.254: 158.16,-55.08 157.58,-55.2
S$261
  Top 0.254: 152.71,-60.09 151.97,-60.84
  Bottom 0.254: 157.58,-55.2 157.09,-55.52
S$262
  Top 0.254: 151.97,-60.84 151.41,-60.84
  Bottom 0.254: 157.09,-55.52 156.76,-56.02
S$263
  Top 0.254: 151.41,-60.84 151.37,-60.74
  Bottom 0.254: 156.76,-56.02 156.65,-56.59
S$264
  Top 0.254: 151.37,-60.74 150.94,-60.32
  Bottom 0.254: 156.65,-56.59 156.76,-57.17
S$265
  Top 0.254: 150.94,-60.32 150.39,-60.09
  Bottom 0.254: 156.76,-57.17 157.09,-57.66
S$266
  Top 0.254: 150.39,-60.09 149.79,-60.09
  Bottom 0.254: 157.09,-57.66 157.58,-57.99
S$267
  Top 0.254: 149.79,-60.09 149.23,-60.32
  Bottom 0.254: 157.58,-57.99 158.16,-58.1
S$268
  Top 0.254: 149.23,-60.32 148.81,-60.74
  Bottom 0.254: 158.16,-58.1 158.53,-58.1
S$269
  Top 0.254: 148.81,-60.74 148.66,-61.09
  Bottom 0.254: 158.53,-58.1 159.1,-57.99
S$270
  Top 0.254: 148.66,-61.09 148.56,-60.97
  Bottom 0.254: 159.1,-57.99 159.13,-57.97
S$271
  Top 0.254: 148.56,-60.97 148.5,-60.48
  Bottom 0.254: 159.13,-57.97 159.21,-58.16
S$272
  Top 0.254: 148.5,-60.48 148.13,-59.84
  Bottom 0.254: 159.21,-58.16 159.47,-58.42
S$273
  Top 0.254: 148.13,-59.84 147.55,-59.39
  Bottom 0.254: 159.47,-58.42 159.81,-58.57
S$274
  Top 0.254: 147.55,-59.39 146.84,-59.2
  Bottom 0.254: 159.81,-58.57 160.19,-58.57
S$275
  Top 0.254: 146.84,-59.2 146.11,-59.29
  Bottom 0.254: 160.19,-58.57 160.49,-58.44
S$276
  Top 0.254: 146.11,-59.29 145.47,-59.66
  Bottom 0.254: 160.49,-58.44
S$277
  Top 0.254: 145.47,-59.66 145.02,-60.24
  Bottom 0.254: 160.49,-58.44 160.49,-59.13
S$278
  Top 0.254: 145.02,-60.24 144.83,-60.95
  Bottom 0.254: 160.49,-59.13 160.55,-59.42
S$279
  Top 0.254: 144.83,-60.95 144.78,-61.61
  Bottom 0.254: 160.55,-59.42 160.56,-59.45
S$280
  Top 0.254: 144.78,-61.61 144.88,-62.34
  Bottom 0.254: 160.56,-59.45 160.56,-59.57
S$281
  Top 0.254: 144.88,-62.34 145.25,-62.98
  Bottom 0.254: 160.56,-59.57 160.71,-59.91
S$282
  Top 0.254: 145.25,-62.98 145.6,-63.25
  Bottom 0.254: 160.71,-59.91 160.97,-60.17
S$283
  Top 0.254: 145.6,-63.25 146.36,-64.62
  Bottom 0.254: 160.97,-60.17 161.31,-60.32
S$284
  Top 0.254: 146.36,-64.62 146.83,-65.18
  Bottom 0.254: 161.31,-60.32 161.69,-60.32
S$285
  Top 0.254: 146.83,-65.18 147.49,-65.52
  Bottom 0.254: 161.69,-60.32 162.03,-60.17
S$286
  Top 0.254: 147.49,-65.52 147.91,-65.55
  Bottom 0.254: 162.03,-60.17 162.29,-59.91
S$287
  Top 0.254: 147.91,-65.55 147.76,-65.9
  Bottom 0.254: 162.29,-59.91 162.44,-59.57
S$288
  Top 0.254: 147.76,-65.9 147.76,-66.49
  Bottom 0.254: 162.44,-59.57 162.44,-59.2
S$289
  Top 0.254: 147.76,-66.49 147.99,-67.04
  Bottom 0.254: 162.44,-59.2 162.29,-58.85
S$290
  Top 0.254: 147.99,-67.04 148.41,-67.46
  Bottom 0.254: 162.29,-58.85 162.03,-58.59
S$291
  Top 0.254: 148.41,-67.46 148.95,-67.69
  Bottom 0.254: 162.03,-58.59 162.01,-58.58
S$292
  Top 0.254: 148.95,-67.69 149.54,-67.69
  Bottom 0.254: 162.01,-58.58 162.01,-58.44
S$293
  Top 0.254: 149.54,-67.69 150.09,-67.46
  Bottom 0.254: 162.01,-58.44 162.04,-58.41
S$294
  Top 0.254: 150.09,-67.46 150.51,-67.04
  Bottom 0.254: 162.04,-58.41 162.19,-58.07
S$295
  Top 0.254: 150.51,-67.04 150.73,-66.5
  Bottom 0.254: 162.19,-58.07 162.19,-57.7
S$296
  Top 0.254: 150.73,-66.5 150.74,-65.91
  Bottom 0.254: 162.19,-57.7 162.04,-57.35
S$297
  Top 0.254: 150.74,-65.91 150.51,-65.36
  Bottom 0.254: 162.04,-57.35 161.78,-57.09
S$298
  Top 0.254: 150.51,-65.36 150.15,-65
  Bottom 0.254: 161.78,-57.09 161.44,-56.95
S$299
  Top 0.254: 150.15,-65 150.58,-65
  Bottom 0.254: 161.44,-56.95 161.06,-56.95
S$300
  Top 0.254: 150.58,-65 150.81,-65.55
  Bottom 0.254: 161.06,-56.95 160.76,-57.07
S$301
  Top 0.254: 150.81,-65.55 151.24,-65.98
  Bottom 0.254: 160.76,-57.07
S$302
  Top 0.254: 151.24,-65.98 151.79,-66.21
  Bottom 0.254: 160.76,-57.07 160.76,-56.31
S$303
  Top 0.254: 151.79,-66.21 152.39,-66.21
  Bottom 0.254: 160.76,-56.31 165.17,-59.62
S$304
  Top 0.254: 152.39,-66.21 152.95,-65.98
  Bottom 0.254: 165.17,-59.62 165.25,-59.66
S$305
  Top 0.254: 152.95,-65.98 153.37,-65.55
  Bottom 0.254: 165.25,-59.66 165.33,-59.71
S$306
  Top 0.254: 153.37,-65.55 153.41,-65.46
  Bottom 0.254: 165.33,-59.71 165.38,-59.72
S$307
  Top 0.254: 153.41,-65.46 153.97,-65.46
  Bottom 0.254: 165.38,-59.72 165.42,-59.74
S$308
  Top 0.254: 153.97,-65.46 154.01,-65.55
  Bottom 0.254: 165.42,-59.74 165.51,-59.75
S$309
  Top 0.254: 154.01,-65.55 154.44,-65.98
  Bottom 0.254: 165.51,-59.75 165.6,-59.77
S$310
  Top 0.254: 154.44,-65.98 154.99,-66.21
  Bottom 0.254: 165.6,-59.77 171.48,-59.77
S$311
  Top 0.254: 154.99,-66.21 155.59,-66.21
  Bottom 0.254: 171.48,-59.77 171.73,-59.82
S$312
  Top 0.254: 155.59,-66.21 156.15,-65.98
  Bottom 0.254: 171.73,-59.82 171.88,-59.92
S$313
  Top 0.254: 156.15,-65.98 156.57,-65.55
  Bottom 0.254: 171.88,-59.92 171.98,-60.07
S$314
  Top 0.254: 156.57,-65.55 156.81,-65
  Bottom 0.254: 171.98,-60.07 172.03,-60.32
S$315
  Top 0.254: 156.81,-65 156.81,-64.4
  Bottom 0.254: 172.03,-60.32 172.03,-108.47
S$316
  Top 0.254: 156.81,-64.4 156.58,-63.84
  Bottom 0.254: 172.03,-108.47 172.05,-108.56
S$317
  Top 0.254: 156.58,-63.84 156.15,-63.42
  Bottom 0.254: 172.05,-108.56 172.06,-108.64
S$318
  Top 0.254: 156.15,-63.42 155.6,-63.19
  Bottom 0.254: 172.06,-108.64 172.08,-108.69
S$319
  Top 0.254: 155.6,-63.19 155,-63.19
  Bottom 0.254: 172.08,-108.69 172.09,-108.74
S$320
  Top 0.254: 155,-63.19 154.44,-63.41
  Bottom 0.254: 172.09,-108.74 172.14,-108.81
S$321
  Top 0.254: 154.44,-63.41 154.01,-63.84
  Bottom 0.254: 172.14,-108.81 172.18,-108.89
S$322
  Top 0.254: 154.01,-63.84 153.97,-63.94
  Bottom 0.254: 172.18,-108.89 172.21,-108.93
S$323
  Top 0.254: 153.97,-63.94 153.41,-63.94
  Bottom 0.254: 172.21,-108.93 172.24,-108.97
S$324
  Top 0.254: 153.41,-63.94 153.38,-63.84
  Bottom 0.254: 172.24,-108.97 172.32,-109.02
S$325
  Top 0.254: 153.38,-63.84 152.95,-63.42
  Bottom 0.254: 172.32,-109.02 172.38,-109.08
S$326
  Top 0.254: 152.95,-63.42 152.4,-63.19
  Bottom 0.254: 172.38,-109.08 192.59,-120.96
S$327
  Top 0.254: 152.4,-63.19 151.79,-63.19
  Bottom 0.254: 192.59,-120.96 192.85,-121.17
S$328
  Top 0.254: 151.79,-63.19 151.24,-63.41
  Bottom 0.254: 192.85,-121.17 192.97,-121.37
S$329
  Top 0.254: 151.24,-63.41 150.81,-63.84
  Bottom 0.254: 192.97,-121.37 193,-121.61
S$330
  Top 0.254: 150.81,-63.84 150.58,-64.39
  Bottom 0.254: 193,-121.61 192.92,-121.88
S$331
  Top 0.254: 150.58,-64.39 150.58,-65
  Bottom 0.254: 192.92,-121.88 177.51,-147.95
S$332
  Top 0.254: 150.58,-65 150.15,-65
  Bottom 0.254: 177.51,-147.95 177.31,-148.22
S$333
  Top 0.254: 150.15,-65 150.09,-64.94
  Bottom 0.254: 177.31,-148.22 177.1,-148.33
S$334
  Top 0.254: 150.09,-64.94 149.56,-64.72
  Bottom 0.254: 177.1,-148.33 176.87,-148.36
S$335
  Top 0.254: 149.56,-64.72 149.82,-64.22
  Bottom 0.254: 176.87,-148.36 176.59,-148.29
S$336
  Top 0.254: 149.82,-64.22 149.88,-63.49
  Bottom 0.254: 176.59,-148.29 161.19,-139.4
S$337
  Top 0.254: 149.88,-63.49 149.75,-63.09
  Bottom 0.254: 161.19,-139.4
S$338
  Top 0.254: 149.75,-63.09 149.78,-63.11
  Bottom 0.254: 161.19,-139.4
S$339
  Top 0.254: 149.78,-63.11 150.39,-63.11
  Bottom 0.254: 161.19,-139.4 161.06,-139.36
S$340
  Top 0.254: 150.39,-63.11 150.94,-62.88
  Bottom 0.254: 161.06,-139.36 160.93,-139.31
S$341
  Top 0.254: 150.94,-62.88 151.37,-62.45
  Bottom 0.254: 160.93,-139.31
S$342
  Top 0.254: 151.37,-62.45 151.41,-62.36
  Bottom 0.254: 160.93,-139.31
S$343
  Top 0.254: 151.41,-62.36 152.28,-62.36
  Bottom 0.254: 160.93,-139.31 153.76,-138.42
S$344
  Top 0.254: 152.28,-62.36 152.57,-62.3
  Bottom 0.254: 153.76,-138.42 153.91,-138.27
S$345
  Top 0.254: 152.57,-62.3 152.72,-62.2
  Bottom 0.254: 153.91,-138.27 154.13,-137.74
S$346
  Top 0.254: 152.72,-62.2 152.74,-62.24
  Bottom 0.254: 154.13,-137.74 154.13,-137.17
S$347
  Top 0.254: 152.74,-62.24 153.05,-62.56
  Bottom 0.254: 154.13,-137.17 154.09,-137.07
S$348
  Top 0.254: 153.05,-62.56 153.47,-62.73
  Bottom 0.254: 154.09,-137.07 167.63,-137.07
S$349
  Top 0.254: 153.47,-62.73 153.92,-62.73
  Bottom 0.254: 167.63,-137.07 167.65,-137.33
S$350
  Top 0.254: 153.92,-62.73 154.33,-62.56
  Bottom 0.254: 167.65,-137.33 167.76,-137.56
S$351
  Top 0.254: 154.33,-62.56 154.62,-62.27
  Bottom 0.254: 167.76,-137.56 167.95,-137.73
S$352
  Top 0.254: 154.62,-62.27 154.68,-62.3
  Bottom 0.254: 167.95,-137.73 169.34,-138.53
S$353
  Top 0.254: 154.68,-62.3 154.97,-62.36
  Bottom 0.254: 169.34,-138.53 169.56,-138.61
S$354
  Top 0.254: 154.97,-62.36 155.98,-62.36
  Bottom 0.254: 169.56,-138.61 169.82,-138.6
S$355
  Top 0.254: 155.98,-62.36 156.02,-62.45
  Bottom 0.254: 169.82,-138.6 169.98,-138.52
S$356
  Top 0.254: 156.02,-62.45 156.44,-62.88
  Bottom 0.254: 169.98,-138.52 170.04,-138.65
S$357
  Top 0.254: 156.44,-62.88 157,-63.11
  Bottom 0.254: 170.04,-138.65 170.24,-138.82
S$358
  Top 0.254: 157,-63.11 157.6,-63.11
  Bottom 0.254: 170.24,-138.82 171.28,-139.42
S$359
  Top 0.254: 157.6,-63.11 158.16,-62.88
  Bottom 0.254: 171.28,-139.42 171.5,-139.5
S$360
  Top 0.254: 158.16,-62.88 158.58,-62.45
  Bottom 0.254: 171.5,-139.5 171.76,-139.49
S$361
  Top 0.254: 158.58,-62.45 158.81,-61.9
  Bottom 0.254: 171.76,-139.49 171.99,-139.38
S$362
  Top 0.254: 158.81,-61.9 158.81,-61.3
  Bottom 0.254: 171.99,-139.38 172.16,-139.18
S$363
  Top 0.254: 158.81,-61.3 158.58,-60.74
  Bottom 0.254: 172.16,-139.18 172.76,-138.15
S$364
  Top 0.254: 158.58,-60.74 158.16,-60.32
  Bottom 0.254: 172.76,-138.15 172.84,-137.92
S$365
  Top 0.254: 158.16,-60.32 157.73,-60.14
  Bottom 0.254: 172.84,-137.92 172.83,-137.66
S$366
  Top 0.254: 157.73,-60.14 159.2,-60.14
  Bottom 0.254: 172.83,-137.66 172.72,-137.43
S$367
  Top 0.254: 159.2,-60.14 159.4,-60.28
  Bottom 0.254: 172.72,-137.43 172.52,-137.26
S$368
  Top 0.254: 159.4,-60.28 159.55,-60.31
  Bottom 0.254: 172.52,-137.26 171.48,-136.66
S$369
  Top 0.254: 159.55,-60.31 159.17,-60.31
  Bottom 0.254: 171.48,-136.66 171.26,-136.58
S$370
  Top 0.254: 159.17,-60.31 159.01,-60.47
  Bottom 0.254: 171.26,-136.58 171.09,-136.59
S$371
  Top 0.254: 159.01,-60.47 159.01,-60.61
  Bottom 0.254: 171.09,-136.59 171.09,-136.43
S$372
  Top 0.254: 159.01,-60.61 159.11,-60.84
  Bottom 0.254: 171.09,-136.43 170.97,-136.19
S$373
  Top 0.254: 159.11,-60.84 159.29,-61.02
  Bottom 0.254: 170.97,-136.19 170.78,-136.03
S$374
  Top 0.254: 159.29,-61.02 159.52,-61.12
  Bottom 0.254: 170.78,-136.03 169.4,-135.22
S$375
  Top 0.254: 159.52,-61.12 159.96,-61.12
  Bottom 0.254: 169.4,-135.22 169.17,-135.15
S$376
  Top 0.254: 159.96,-61.12 160.12,-60.96
  Bottom 0.254: 169.17,-135.15 168.91,-135.16
S$377
  Top 0.254: 160.12,-60.96 160.12,-60.33
  Bottom 0.254: 168.91,-135.16 168.68,-135.27
S$378
  Top 0.254: 160.12,-60.33 160.38,-60.33
  Bottom 0.254: 168.68,-135.27 168.51,-135.46
S$379
  Top 0.254: 160.38,-60.33 160.38,-60.96
  Bottom 0.254: 168.51,-135.46 167.71,-136.85
S$380
  Top 0.254: 160.38,-60.96 160.54,-61.12
  Bottom 0.254: 167.71,-136.85 167.63,-137.07
S$381
  Top 0.254: 160.54,-61.12 160.98,-61.12
  Bottom 0.254: 167.63,-137.07 154.09,-137.07
S$382
  Top 0.254: 160.98,-61.12 161.21,-61.02
  Bottom 0.254: 154.09,-137.07 153.92,-136.64
S$383
  Top 0.254: 161.21,-61.02 161.39,-60.84
  Bottom 0.254: 153.92,-136.64 153.51,-136.24
S$384
  Top 0.254: 161.39,-60.84 161.49,-60.61
  Bottom 0.254: 153.51,-136.24 153.46,-136.22
S$385
  Top 0.254: 161.49,-60.61 161.49,-60.47
  Bottom 0.254: 153.46,-136.22 153.46,-133.75
S$386
  Top 0.254: 161.49,-60.47 161.33,-60.32
  Bottom 0.254: 153.46,-133.75 157.22,-129.98
S$387
  Top 0.254: 161.33,-60.32 161.67,-60.32
  Bottom 0.254: 157.22,-129.98 157.34,-130.27
S$388
  Top 0.254: 161.67,-60.32 161.51,-60.47
  Bottom 0.254: 157.34,-130.27 157.76,-130.69
S$389
  Top 0.254: 161.51,-60.47 161.51,-60.61
  Bottom 0.254: 157.76,-130.69 158.3,-130.91
S$390
  Top 0.254: 161.51,-60.61 161.61,-60.84
  Bottom 0.254: 158.3,-130.91 158.9,-130.91
S$391
  Top 0.254: 161.61,-60.84 161.79,-61.02
  Bottom 0.254: 158.9,-130.91 159.44,-130.69
S$392
  Top 0.254: 161.79,-61.02 162.02,-61.12
  Bottom 0.254: 159.44,-130.69 159.86,-130.27
S$393
  Top 0.254: 162.02,-61.12 162.46,-61.12
  Bottom 0.254: 159.86,-130.27 159.97,-130.02
S$394
  Top 0.254: 162.46,-61.12 162.62,-60.96
  Bottom 0.254: 159.97,-130.02 169.92,-130.02
S$395
  Top 0.254: 162.62,-60.96 162.62,-60.33
  Bottom 0.254: 169.92,-130.02 170.02,-130.75
S$396
  Top 0.254: 162.62,-60.33 162.88,-60.33
  Bottom 0.254: 170.02,-130.75 170.38,-131.38
S$397
  Top 0.254: 162.88,-60.33 162.88,-60.96
  Bottom 0.254: 170.38,-131.38 170.78,-131.68
S$398
  Top 0.254: 162.88,-60.96 163.04,-61.12
  Bottom 0.254: 170.78,-131.68 170.9,-132.01
S$399
  Top 0.254: 163.04,-61.12 163.48,-61.12
  Bottom 0.254: 170.9,-132.01 171.81,-133.54
S$400
  Top 0.254: 163.48,-61.12 163.71,-61.02
  Bottom 0.254: 171.81,-133.54 172.31,-134.08
S$401
  Top 0.254: 163.71,-61.02 163.89,-60.84
  Bottom 0.254: 172.31,-134.08 172.97,-134.4
S$402
  Top 0.254: 163.89,-60.84 163.99,-60.61
  Bottom 0.254: 172.97,-134.4 173.55,-134.43
S$403
  Top 0.254: 163.99,-60.61 163.99,-60.47
  Bottom 0.254: 173.55,-134.43 173.48,-134.6
S$404
  Top 0.254: 163.99,-60.47 163.83,-60.31
  Bottom 0.254: 173.48,-134.6 173.48,-135.19
S$405
  Top 0.254: 163.83,-60.31 163.46,-60.31
  Bottom 0.254: 173.48,-135.19 173.71,-135.73
S$406
  Top 0.254: 163.46,-60.31 163.59,-60.28
  Bottom 0.254: 173.71,-135.73 174.12,-136.15
S$407
  Top 0.254: 163.59,-60.28 163.8,-60.15
  Bottom 0.254: 174.12,-136.15 174.67,-136.38
S$408
  Top 0.254: 163.8,-60.15 163.94,-59.94
  Bottom 0.254: 174.67,-136.38 175.26,-136.38
S$409
  Top 0.254: 163.94,-59.94 163.99,-59.9
  Bottom 0.254: 175.26,-136.38 175.81,-136.15
S$410
  Top 0.254: 163.99,-59.9 163.99,-59.76
  Bottom 0.254: 175.81,-136.15 176.22,-135.74
S$411
  Top 0.254: 163.99,-59.76 163.98,-59.75
  Bottom 0.254: 176.22,-135.74 176.45,-135.19
S$412
  Top 0.254: 163.98,-59.75 164,-59.68
  Bottom 0.254: 176.45,-135.19 176.45,-134.6
S$413
  Top 0.254: 164,-59.68 164,-59.08
  Bottom 0.254: 176.45,-134.6 176.23,-134.05
S$414
  Top 0.254: 164,-59.08 163.98,-58.98
  Bottom 0.254: 176.23,-134.05 175.81,-133.63
S$415
  Top 0.254: 163.98,-58.98 164,-58.88
  Bottom 0.254: 175.81,-133.63 175.26,-133.41
S$416
  Top 0.254: 164,-58.88 164,-58.74
  Bottom 0.254: 175.26,-133.41 175.08,-133.41
S$417
  Top 0.254: 164,-58.74 165.17,-59.62
  Bottom 0.254: 175.08,-133.41 175.26,-133.03
S$418
  Top 0.254: 165.17,-59.62 165.25,-59.66
  Bottom 0.254: 175.26,-133.03 175.29,-132.29
S$419
  Top 0.254: 165.25,-59.66 165.33,-59.71
  Bottom 0.254: 175.29,-132.29 175.04,-131.6
S$420
  Top 0.254: 165.33,-59.71 165.38,-59.72
  Bottom 0.254: 175.04,-131.6 174.24,-130.25
S$421
  Top 0.254: 165.38,-59.72 165.42,-59.74
  Bottom 0.254: 174.24,-130.25 174.18,-129.82
S$422
  Top 0.254: 165.42,-59.74 165.51,-59.75
  Bottom 0.254: 174.18,-129.82 173.81,-129.18
S$423
  Top 0.254: 165.51,-59.75 165.6,-59.77
  Bottom 0.254: 173.81,-129.18 173.23,-128.74
S$424
  Top 0.254: 165.6,-59.77 171.48,-59.77
  Bottom 0.254: 173.23,-128.74 172.63,-128.44
S$425
  Top 0.254: 171.48,-59.77 171.73,-59.82
  Bottom 0.254: 172.63,-128.44 171.92,-128.25
S$426
  Top 0.254: 171.73,-59.82 171.88,-59.92
  Bottom 0.254: 171.92,-128.25 171.19,-128.35
S$427
  Top 0.254: 171.88,-59.92 171.98,-60.07
  Bottom 0.254: 171.19,-128.35 170.55,-128.72
S$428
  Top 0.254: 171.98,-60.07 172.03,-60.32
  Bottom 0.254: 170.55,-128.72 170.11,-129.31
S$429
  Top 0.254: 172.03,-60.32 172.03,-108.47
  Bottom 0.254: 170.11,-129.31 169.92,-130.02
S$430
  Top 0.254: 172.03,-108.47 172.05,-108.56
  Bottom 0.254: 169.92,-130.02 159.97,-130.02
S$431
  Top 0.254: 172.05,-108.56 172.06,-108.64
  Bottom 0.254: 159.97,-130.02 160.09,-129.72
S$432
  Top 0.254: 172.06,-108.64 172.08,-108.69
  Bottom 0.254: 160.09,-129.72 160.09,-129.13
S$433
  Top 0.254: 172.08,-108.69 172.09,-108.74
  Bottom 0.254: 160.09,-129.13 159.86,-128.59
S$434
  Top 0.254: 172.09,-108.74 172.14,-108.81
  Bottom 0.254: 159.86,-128.59 159.44,-128.17
S$435
  Top 0.254: 172.14,-108.81 172.18,-108.89
  Bottom 0.254: 159.44,-128.17 159.27,-128.1
S$436
  Top 0.254: 172.18,-108.89 172.21,-108.93
  Bottom 0.254: 159.27,-128.1 159.66,-127.67
S$437
  Top 0.254: 172.21,-108.93 172.24,-108.97
  Bottom 0.254: 159.66,-127.67 159.91,-126.97
S$438
  Top 0.254: 172.24,-108.97 172.32,-109.02
  Bottom 0.254: 159.91,-126.97 159.87,-126.24
S$439
  Top 0.254: 172.32,-109.02 172.38,-109.08
  Bottom 0.254: 159.87,-126.24 159.84,-126.09
S$440
  Top 0.254: 172.38,-109.08 192.59,-120.96
  Bottom 0.254: 159.84,-126.09 172.49,-126.09
S$441
  Top 0.254: 192.59,-120.96 192.85,-121.17
  Bottom 0.254: 172.49,-126.09 172.77,-126.77
S$442
  Top 0.254: 192.85,-121.17 192.97,-121.37
  Bottom 0.254: 172.77,-126.77 173.29,-127.3
S$443
  Top 0.254: 192.97,-121.37 193,-121.61
  Bottom 0.254: 173.29,-127.3 173.84,-127.67
S$444
  Top 0.254: 193,-121.61 192.92,-121.88
  Bottom 0.254: 173.84,-127.67 174.52,-127.95
S$445
  Top 0.254: 192.92,-121.88 177.51,-147.95
  Bottom 0.254: 174.52,-127.95 175.26,-127.95
S$446
  Top 0.254: 177.51,-147.95 177.31,-148.22
  Bottom 0.254: 175.26,-127.95 175.67,-127.78
S$447
  Top 0.254: 177.31,-148.22 177.1,-148.33
  Bottom 0.254: 175.67,-127.78 177.23,-127.81
S$448
  Top 0.254: 177.1,-148.33 176.87,-148.36
  Bottom 0.254: 177.23,-127.81 177.96,-127.68
S$449
  Top 0.254: 176.87,-148.36 176.59,-148.29
  Bottom 0.254: 177.96,-127.68 177.97,-127.67
S$450
  Top 0.254: 176.59,-148.29 161.77,-139.74
  Bottom 0.254: 177.97,-127.67 178.25,-127.96
S$451
  Top 0.254: 161.77,-139.74 172.65,-139.74
  Bottom 0.254: 178.25,-127.96 178.03,-127.86
S$452
  Top 0.254: 172.65,-139.74 172.66,-139.99
  Bottom 0.254: 178.03,-127.86 176.99,-127.86
S$453
  Top 0.254: 172.66,-139.99 172.77,-140.23
  Bottom 0.254: 176.99,-127.86 176.02,-128.26
S$454
  Top 0.254: 172.77,-140.23 172.96,-140.4
  Bottom 0.254: 176.02,-128.26 175.28,-129
S$455
  Top 0.254: 172.96,-140.4 174,-141
  Bottom 0.254: 175.28,-129 174.88,-129.97
S$456
  Top 0.254: 174,-141 174.23,-141.07
  Bottom 0.254: 174.88,-129.97 174.88,-131.01
S$457
  Top 0.254: 174.23,-141.07 174.49,-141.06
  Bottom 0.254: 174.88,-131.01 175.28,-131.98
S$458
  Top 0.254: 174.49,-141.06 174.67,-140.97
  Bottom 0.254: 175.28,-131.98 176.01,-132.72
S$459
  Top 0.254: 174.67,-140.97 174.69,-140.99
  Bottom 0.254: 176.01,-132.72 176.98,-133.12
S$460
  Top 0.254: 174.69,-140.99 174.69,-141.06
  Bottom 0.254: 176.98,-133.12 178.03,-133.12
S$461
  Top 0.254: 174.69,-141.06 174.9,-141.59
  Bottom 0.254: 178.03,-133.12 178.99,-132.72
S$462
  Top 0.254: 174.9,-141.59 175.31,-141.99
  Bottom 0.254: 178.99,-132.72 179.73,-131.99
S$463
  Top 0.254: 175.31,-141.99 175.84,-142.21
  Bottom 0.254: 179.73,-131.99 180.13,-131.02
S$464
  Top 0.254: 175.84,-142.21 176.41,-142.21
  Bottom 0.254: 180.13,-131.02 180.14,-129.97
S$465
  Top 0.254: 176.41,-142.21 176.93,-142
  Bottom 0.254: 180.14,-129.97 180.04,-129.75
S$466
  Top 0.254: 176.93,-142 177.34,-141.59
  Bottom 0.254: 180.04,-129.75 180.49,-130.2
S$467
  Top 0.254: 177.34,-141.59 177.56,-141.06
  Bottom 0.254: 180.49,-130.2 180.49,-132.07
S$468
  Top 0.254: 177.56,-141.06 177.56,-140.49
  Bottom 0.254: 180.49,-132.07 175.58,-136.97
S$469
  Top 0.254: 177.56,-140.49 177.34,-139.97
  Bottom 0.254: 175.58,-136.97 175.42,-137.22
S$470
  Top 0.254: 177.34,-139.97 176.94,-139.56
  Bottom 0.254: 175.42,-137.22 175.36,-137.51
S$471
  Top 0.254: 176.94,-139.56 176.41,-139.34
  Bottom 0.254: 175.36,-137.51 175.36,-138.93
S$472
  Top 0.254: 176.41,-139.34 175.84,-139.34
  Bottom 0.254: 175.36,-138.93 175.25,-138.84
S$473
  Top 0.254: 175.84,-139.34 175.6,-139.44
  Bottom 0.254: 175.25,-138.84 174.21,-138.24
S$474
  Top 0.254: 175.6,-139.44 175.56,-139.42
  Bottom 0.254: 174.21,-138.24 173.99,-138.16
S$475
  Top 0.254: 175.56,-139.42 175.56,-139.24
  Bottom 0.254: 173.99,-138.16 173.73,-138.17
S$476
  Top 0.254: 175.56,-139.24 175.44,-139
  Bottom 0.254: 173.73,-138.17 173.5,-138.28
S$477
  Top 0.254: 175.44,-139 175.25,-138.84
  Bottom 0.254: 173.5,-138.28 173.33,-138.47
S$478
  Top 0.254: 175.25,-138.84 174.21,-138.24
  Bottom 0.254: 173.33,-138.47 172.73,-139.51
S$479
  Top 0.254: 174.21,-138.24 173.99,-138.16
  Bottom 0.254: 172.73,-139.51 172.65,-139.74
S$480
  Top 0.254: 173.99,-138.16 173.73,-138.17
  Bottom 0.254: 172.65,-139.74 172.66,-139.99
S$481
  Top 0.254: 173.73,-138.17 173.5,-138.28
  Bottom 0.254: 172.66,-139.99 172.77,-140.23
S$482
  Top 0.254: 173.5,-138.28 173.33,-138.47
  Bottom 0.254: 172.77,-140.23 172.96,-140.4
S$483
  Top 0.254: 173.33,-138.47 172.73,-139.51
  Bottom 0.254: 172.96,-140.4 174,-141
S$484
  Top 0.254: 172.73,-139.51 172.65,-139.74
  Bottom 0.254: 174,-141 174.23,-141.07
S$485
  Top 0.254: 172.65,-139.74 161.77,-139.74
  Bottom 0.254: 174.23,-141.07 174.49,-141.06
S$486
  Top 0.254: 161.77,-139.74 161.19,-139.4
  Bottom 0.254: 174.49,-141.06 174.67,-140.97
S$487
  Top 0.254: 161.19,-139.4
  Bottom 0.254: 174.67,-140.97 174.69,-140.99
S$488
  Top 0.254: 161.19,-139.4
  Bottom 0.254: 174.69,-140.99 174.69,-141.06
S$489
  Top 0.254: 161.19,-139.4 161.06,-139.36
  Bottom 0.254: 174.69,-141.06 174.9,-141.59
S$490
  Top 0.254: 161.06,-139.36 160.93,-139.31
  Bottom 0.254: 174.9,-141.59 175.31,-141.99
S$491
  Top 0.254: 160.93,-139.31
  Bottom 0.254: 175.31,-141.99 175.84,-142.21
S$492
  Top 0.254: 160.93,-139.31
  Bottom 0.254: 175.84,-142.21 176.41,-142.21
S$493
  Top 0.254: 160.93,-139.31 153.76,-138.42
  Bottom 0.254: 176.41,-142.21 176.93,-142
S$494
  Top 0.254: 153.76,-138.42 153.91,-138.27
  Bottom 0.254: 176.93,-142 177.34,-141.59
S$495
  Top 0.254: 153.91,-138.27 154.13,-137.74
  Bottom 0.254: 177.34,-141.59 177.56,-141.06
S$496
  Top 0.254: 154.13,-137.74 154.13,-137.17
  Bottom 0.254: 177.56,-141.06 177.56,-140.49
S$497
  Top 0.254: 154.13,-137.17 154.08,-137.03
  Bottom 0.254: 177.56,-140.49 177.34,-139.97
S$498
  Top 0.254: 154.08,-137.03 154.46,-137.42
  Bottom 0.254: 177.34,-139.97 176.94,-139.56
S$499
  Top 0.254: 154.46,-137.42 154.71,-137.58
  Bottom 0.254: 176.94,-139.56 176.88,-139.54
S$500
  Top 0.254: 154.71,-137.58 155,-137.64
  Bottom 0.254: 176.88,-139.54 176.88,-137.82
S$501
  Top 0.254: 155,-137.64 167.84,-137.64
  Bottom 0.254: 176.88,-137.82 181.79,-132.92
S$502
  Top 0.254: 167.84,-137.64 167.95,-137.73
  Bottom 0.254: 181.79,-132.92 181.95,-132.67
S$503
  Top 0.254: 167.95,-137.73 169.34,-138.53
  Bottom 0.254: 181.95,-132.67 182.01,-132.38
S$504
  Top 0.254: 169.34,-138.53 169.56,-138.61
  Bottom 0.254: 182.01,-132.38 182.01,-129.88
S$505
  Top 0.254: 169.56,-138.61 169.82,-138.6
  Bottom 0.254: 182.01,-129.88 181.95,-129.59
S$506
  Top 0.254: 169.82,-138.6 169.98,-138.52
  Bottom 0.254: 181.95,-129.59 181.79,-129.34
S$507
  Top 0.254: 169.98,-138.52 170.04,-138.65
  Bottom 0.254: 181.79,-129.34 180.02,-127.58
S$508
  Top 0.254: 170.04,-138.65 170.24,-138.82
  Bottom 0.254: 180.02,-127.58 180.34,-127.58
S$509
  Top 0.254: 170.24,-138.82 171.28,-139.42
  Bottom 0.254: 180.34,-127.58 180.89,-127.36
S$510
  Top 0.254: 171.28,-139.42 171.5,-139.5
  Bottom 0.254: 180.89,-127.36 181.31,-126.94
S$511
  Top 0.254: 171.5,-139.5 171.76,-139.49
  Bottom 0.254: 181.31,-126.94 181.53,-126.39
S$512
  Top 0.254: 171.76,-139.49 171.99,-139.38
  Bottom 0.254: 181.53,-126.39 181.53,-125.8
S$513
  Top 0.254: 171.99,-139.38 172.16,-139.18
  Bottom 0.254: 181.53,-125.8 181.31,-125.25
S$514
  Top 0.254: 172.16,-139.18 172.76,-138.15
  Bottom 0.254: 181.31,-125.25 180.89,-124.83
S$515
  Top 0.254: 172.76,-138.15 172.84,-137.92
  Bottom 0.254: 180.89,-124.83 180.34,-124.61
S$516
  Top 0.254: 172.84,-137.92 172.83,-137.66
  Bottom 0.254: 180.34,-124.61 179.75,-124.61
S$517
  Top 0.254: 172.83,-137.66 172.72,-137.43
  Bottom 0.254: 179.75,-124.61 179.21,-124.83
S$518
  Top 0.254: 172.72,-137.43 172.52,-137.26
  Bottom 0.254: 179.21,-124.83 178.94,-125.1
S$519
  Top 0.254: 172.52,-137.26 171.48,-136.66
  Bottom 0.254: 178.94,-125.1 178.62,-124.61
S$520
  Top 0.254: 171.48,-136.66 171.26,-136.58
  Bottom 0.254: 178.62,-124.61 178.01,-124.19
S$521
  Top 0.254: 171.26,-136.58 171.09,-136.59
  Bottom 0.254: 178.01,-124.19 177.3,-124.04
S$522
  Top 0.254: 171.09,-136.59 171.09,-136.43
  Bottom 0.254: 177.3,-124.04 175.52,-124.01
S$523
  Top 0.254: 171.09,-136.43 170.97,-136.19
  Bottom 0.254: 175.52,-124.01 175.17,-124.07
S$524
  Top 0.254: 170.97,-136.19 170.78,-136.03
  Bottom 0.254: 175.17,-124.07 174.71,-123.88
S$525
  Top 0.254: 170.78,-136.03 169.4,-135.22
  Bottom 0.254: 174.71,-123.88 173.98,-123.88
S$526
  Top 0.254: 169.4,-135.22 169.17,-135.15
  Bottom 0.254: 173.98,-123.88 173.3,-124.16
S$527
  Top 0.254: 169.17,-135.15 168.91,-135.16
  Bottom 0.254: 173.3,-124.16 172.78,-124.68
S$528
  Top 0.254: 168.91,-135.16 168.68,-135.27
  Bottom 0.254: 172.78,-124.68 172.49,-125.36
S$529
  Top 0.254: 168.68,-135.27 168.51,-135.46
  Bottom 0.254: 172.49,-125.36 172.49,-126.09
S$530
  Top 0.254: 168.51,-135.46 168.13,-136.12
  Bottom 0.254: 172.49,-126.09 159.84,-126.09
S$531
  Top 0.254: 168.13,-136.12 155.31,-136.12
  Bottom 0.254: 159.84,-126.09 159.44,-124.52
S$532
  Top 0.254: 155.31,-136.12 153.54,-134.34
  Bottom 0.254: 159.44,-124.52 159.29,-124.2
S$533
  Top 0.254: 153.54,-134.34 153.29,-134.18
  Bottom 0.254: 159.29,-124.2 159.36,-123.7
S$534
  Top 0.254: 153.29,-134.18 153,-134.12
  Bottom 0.254: 159.36,-123.7 159.17,-122.99
S$535
  Top 0.254: 153,-134.12 148.57,-134.12
  Bottom 0.254: 159.17,-122.99 158.72,-122.41
S$536
  Top 0.254: 148.57,-134.12 148.28,-134.18
  Bottom 0.254: 158.72,-122.41 158.09,-122.04
S$537
  Top 0.254: 148.28,-134.18 148.03,-134.34
  Bottom 0.254: 158.09,-122.04 157.36,-121.94
S$538
  Top 0.254: 148.03,-134.34 147.58,-134.79
  Bottom 0.254: 157.36,-121.94 156.65,-122.13
S$539
  Top 0.254: 147.58,-134.79 147.15,-134.68
  Bottom 0.254: 156.65,-122.13 156.06,-122.58
S$540
  Top 0.254: 147.15,-134.68 146.91,-134.66
  Bottom 0.254: 156.06,-122.58 155.69,-123.21
S$541